# EAGLE board RADiuS-D (EAGLE 6.2)
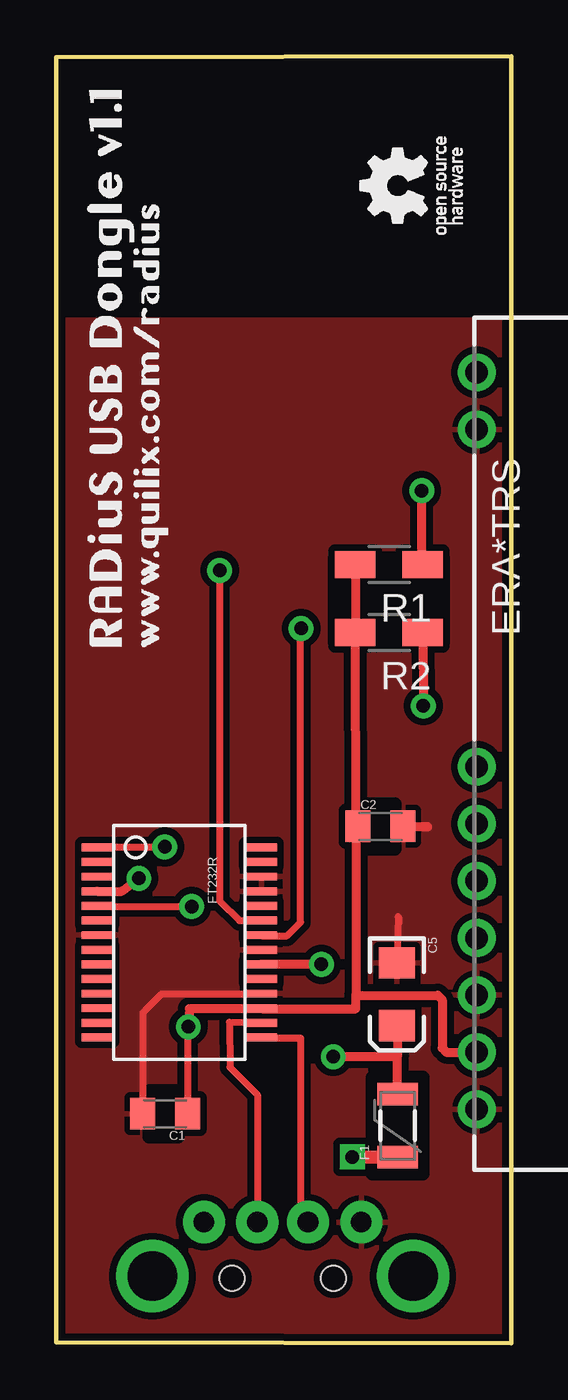
[diagram p0: board, top side]
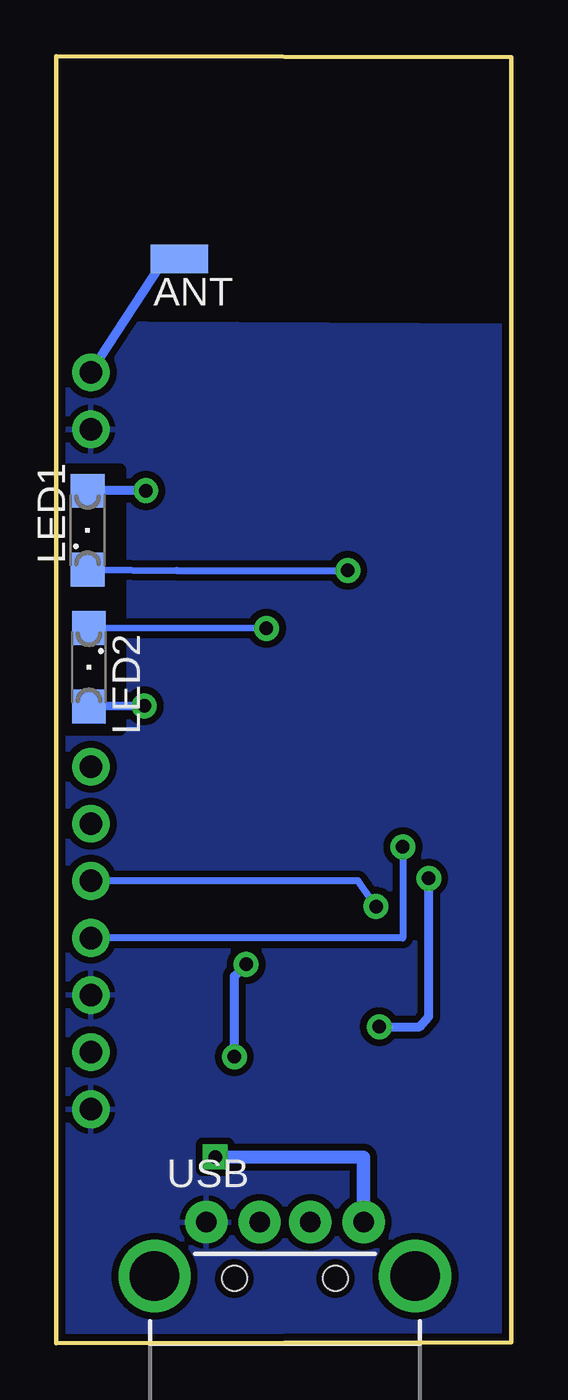
[diagram p1: board, bottom side, seen from below]

Size 20.26 x 57.25 mm. Coordinates in mm from the lower left corner, seen from the top.
Outline: 20.26,57.25 20.26,0 0,0.05 0,57.2 20.26,57.25
Copper layers (1*16): Top 0.035mm / dielectric 1.5mm / Bottom 0.035mm
Design rules: minimum track width 8mil, minimum drill 20mil, track to track 8mil, track to pad 8mil, pad to pad 8mil, via to via 8mil, smd to smd 8mil, copper to edge 10mil, drill to drill 8mil, minimum pad ring 12mil, minimum via ring 10mil, stop-mask expansion 4mil, vias tented up to drill 20mil, thermal gap 10mil
Net classes: 0 default: width 0.203 mm; 1 power: width 0.254 mm
tRestrict: area 14.1,7.5 to 16.3,11.8; area 4.1,9.2 to 5.4,11.2; area 13.8,22 to 15.1,24; area 12.4,31.2 to 17.2,34.9
bRestrict: area 17.4,27.3 to 19.9,38.8

## Footprints (pad centres in the part's own frame; a part is rotated, then mirrored left to right if it is on the bottom)
SMD1,27-2,54 = smd 1.27 x 2.54: 1 0,0
C0805K = smd 1.1 x 1.4: 1 -1,0; 2 1,0
EIA3216 = smd 1.4 x 1.6: A 1.4,0; C -1.4,0
SIL9 = drill 1 pad 1.676: 1 -16.51,2.54; 2 -13.97,2.54; 3 1.03,2.54; 4 3.57,2.54; 5 6.11,2.54; 6 8.65,2.54; 7 11.19,2.54; 8 13.73,2.54; 9 16.27,2.54
PTC-1206 = smd 1 x 1.8: 1 -1.4,0; 2 1.4,0
SSOP28DB = smd 0.348 x 1.397: 1 -4.225,-3.656; 2 -3.575,-3.656; 3 -2.925,-3.656; 4 -2.275,-3.656; 5 -1.625,-3.656; 6 -0.975,-3.656; 7 -0.325,-3.656; 8 0.325,-3.656; 9 0.975,-3.656; 10 1.625,-3.656; 11 2.275,-3.656; 12 2.925,-3.656; 13 3.575,-3.656; 14 4.225,-3.656; 15 4.225,3.656; 16 3.575,3.656; 17 2.925,3.656; 18 2.275,3.656; 19 1.625,3.656; 20 0.975,3.656; 21 0.325,3.656; 22 -0.325,3.656; 23 -0.975,3.656; 24 -1.625,3.656; 25 -2.275,3.656; 26 -2.925,3.656; 27 -3.575,3.656; 28 -4.225,3.656
SML1206 = smd 1.5 x 1.5: A 1.75,0; C -1.75,0
R1206W = smd 1.8 x 1.2: 1 -1.499,0; 2 1.499,0
USB-A-H = drill 0.914 pad 1.88: D+ 2.4,1.127; D- 2.4,-1.127; GND 2.4,3.5; VBUS 2.4,-3.5 | drill 2.2: GND2 0,-5.8; GND3 0,5.8 | hole 1.1: -0.1,2.25; -0.1,-2.25

## Placement (x,y rotation side)
ANT  [SMD1,27-2,54]  14.78,48.23 90 bottom
C1  0.1uF  [C0805K]  4.85,10.21 180 top
C2  0.1uF  [C0805K]  14.43,23 0 top
C5  10uF  [EIA3216]  15.17,15.52 270 top
ERA*TRS  [SIL9]  16.18,26.68 270 top
F1  500mA  [PTC-1206]  15.19,9.68 90 top
FT232R  FT232R  [SSOP28DB]  5.48,17.83 270 top
LED1  Red  [SML1206]  18.86,36.17 90 bottom
LED2  Green  [SML1206]  18.8,30.07 270 bottom
R1  330  [R1206W]  14.81,34.64 180 top
R2  330  [R1206W]  14.81,31.62 180 top
U$1  CREATIVE_COMMONS  [CREATIVE_COMMONS]  -2.25,-0.31 0 top
USB  USBSMD  [USB-A-H]  10.08,2.99 90 bottom

## Library data of the parts
ANT = wirepad
C1 C2 = adafruit
C5 F1 FT232R U$1 USB = SparkFun
ERA*TRS = lprs
LED1 LED2 = led
R1 R2 = ref-packages

## Nets
3.3V [power]: C1.1 C2.1 ERA*TRS.8 FT232R.4 FT232R.17 R1.2 R2.2
GND [power]: C1.2 C2.2 C5.C ERA*TRS.2 ERA*TRS.7 ERA*TRS.9 FT232R.7 FT232R.18 FT232R.21 FT232R.25 FT232R.26 USB.GND
N$1: LED1.A R1.1
N$2: LED2.A R2.1
N$3: F1.1 USB.VBUS
RXD: ERA*TRS.5 FT232R.5
RXLED: FT232R.22 LED2.C
S$1: ANT.1 ERA*TRS.1
S$2 [power]: C5.A F1.2 FT232R.20
TXD: ERA*TRS.6 FT232R.1
TXLED: FT232R.23 LED1.C
USB_D+: FT232R.15 USB.D+
USB_D-: FT232R.16 USB.D-

## Tracks (layer width: path | path; a pad name or v marks a point on that pad's centre or on a via)
3.3V  (via drill 0.6)
  Top 0.305: 9.11,14.88 FT232R.17 9.16,14.88 | 5.85,14.1 C1.1 | 13.31,31.45 R2.2 | C2.1 13.33,23.03
  Top 0.406: 9.11,14.88 5.93,14.88 v5.88,14.08 5.85,14.1 | 9.16,14.88 13.33,14.88 13.33,15.48 | 13.33,15.48 16.98,15.48 17.18,15.28 17.18,13.13 17.36,12.95 ERA*TRS.8 | FT232R.4 2.91,20.1 v3.68,20.68 | R1.2 R2.2 | 13.31,31.45 13.33,23.03 13.33,15.48
  Bottom 0.406: v5.88,14.08 4.08,14.08 3.68,14.53 v3.68,20.68
GND
  Top 0.305: FT232R.18 9.11,15.53 4.68,15.53 3.85,14.7 C1.2 | 15.22,18.97 C5.C
  Top 0.406: 15.58,22.98 16.53,22.98
  pour Bottom (isolate 0.305): 0.05,45.25 20.21,45.35 20.21,0.39 0.05,0.29
  pour Top (isolate 0.305): 0.05,45.5 20.26,45.5 20.31,0.16 0.1,0.21
N$1  (via drill 0.6)
  Top 0.406: R1.1 16.27,34.68 v16.27,37.93
  Bottom 0.406: v16.27,37.93 LED1.A
N$2  (via drill 0.6)
  Top 0.406: R2.1 v16.34,28.35
  Bottom 0.406: v16.34,28.35 LED2.A
N$3  (via drill 0.6)
  Top 0.61: F1.1 v13.18,8.29
  Bottom 0.61: v13.18,8.29 6.58,8.28 USB.VBUS
RXD  (via drill 0.6)
  Top 0.305: FT232R.5 1.85,19.43 v6.03,19.43
  Bottom 0.305: v6.03,19.43 6.82,20.57 ERA*TRS.5
RXLED  (via drill 0.6)
  Top 0.305: FT232R.22 9.16,18.13 10.28,18.13 10.88,18.73 10.88,31.58 v10.9,31.8
  Bottom 0.305: v10.9,31.8 LED2.C
S$1
  Bottom 0.305: 14.38,48.08 ANT.1
  Bottom 0.406: ERA*TRS.1 15.23,48.53 arc107 ANT.1
S$2  (via drill 0.6)
  Top 0.305: C5.A 15.2,13.95
  Top 0.406: 15.2,13.95 15.18,12.75 15.18,12.74 | F1.2 15.18,11.08 15.18,12.74 | v11.81,16.85 FT232R.20 | 15.18,12.74 v12.33,12.74
  Bottom 0.406: v11.81,16.85 12.33,16.33 v12.33,12.74
TXD  (via drill 0.6)
  Top 0.305: FT232R.1 1.9,22.08 v4.83,22.08
  Bottom 0.305: v4.83,22.08 4.83,18.03 ERA*TRS.6
TXLED  (via drill 0.6)
  Top 0.305: v7.28,34.38 7.28,19.68 8.16,18.8 FT232R.23
  Bottom 0.305: LED1.C 14.9,34.38 v7.28,34.38
USB_D+
  Top 0.305: FT232R.15 9.16,13.58 10.88,13.58 10.88,6.33 11.2,5.4 USB.D+
USB_D-
  Top 0.305: FT232R.16 7.71,14.28 7.73,12.28 8.96,11.05 USB.D-